# Altium PCB EG4S20_CoreBoard.PcbDoc
Units mil, origin at the board's own origin, x right, y up, seen from the top; angles counter-clockwise.
Board outline 3937.01 x 2677.17 mil, 2 copper layers (Top Layer, Bottom Layer); 24 components, 35 nets, 425 pads, 46 vias.
Unrouted connection lines stored in the file: 4.
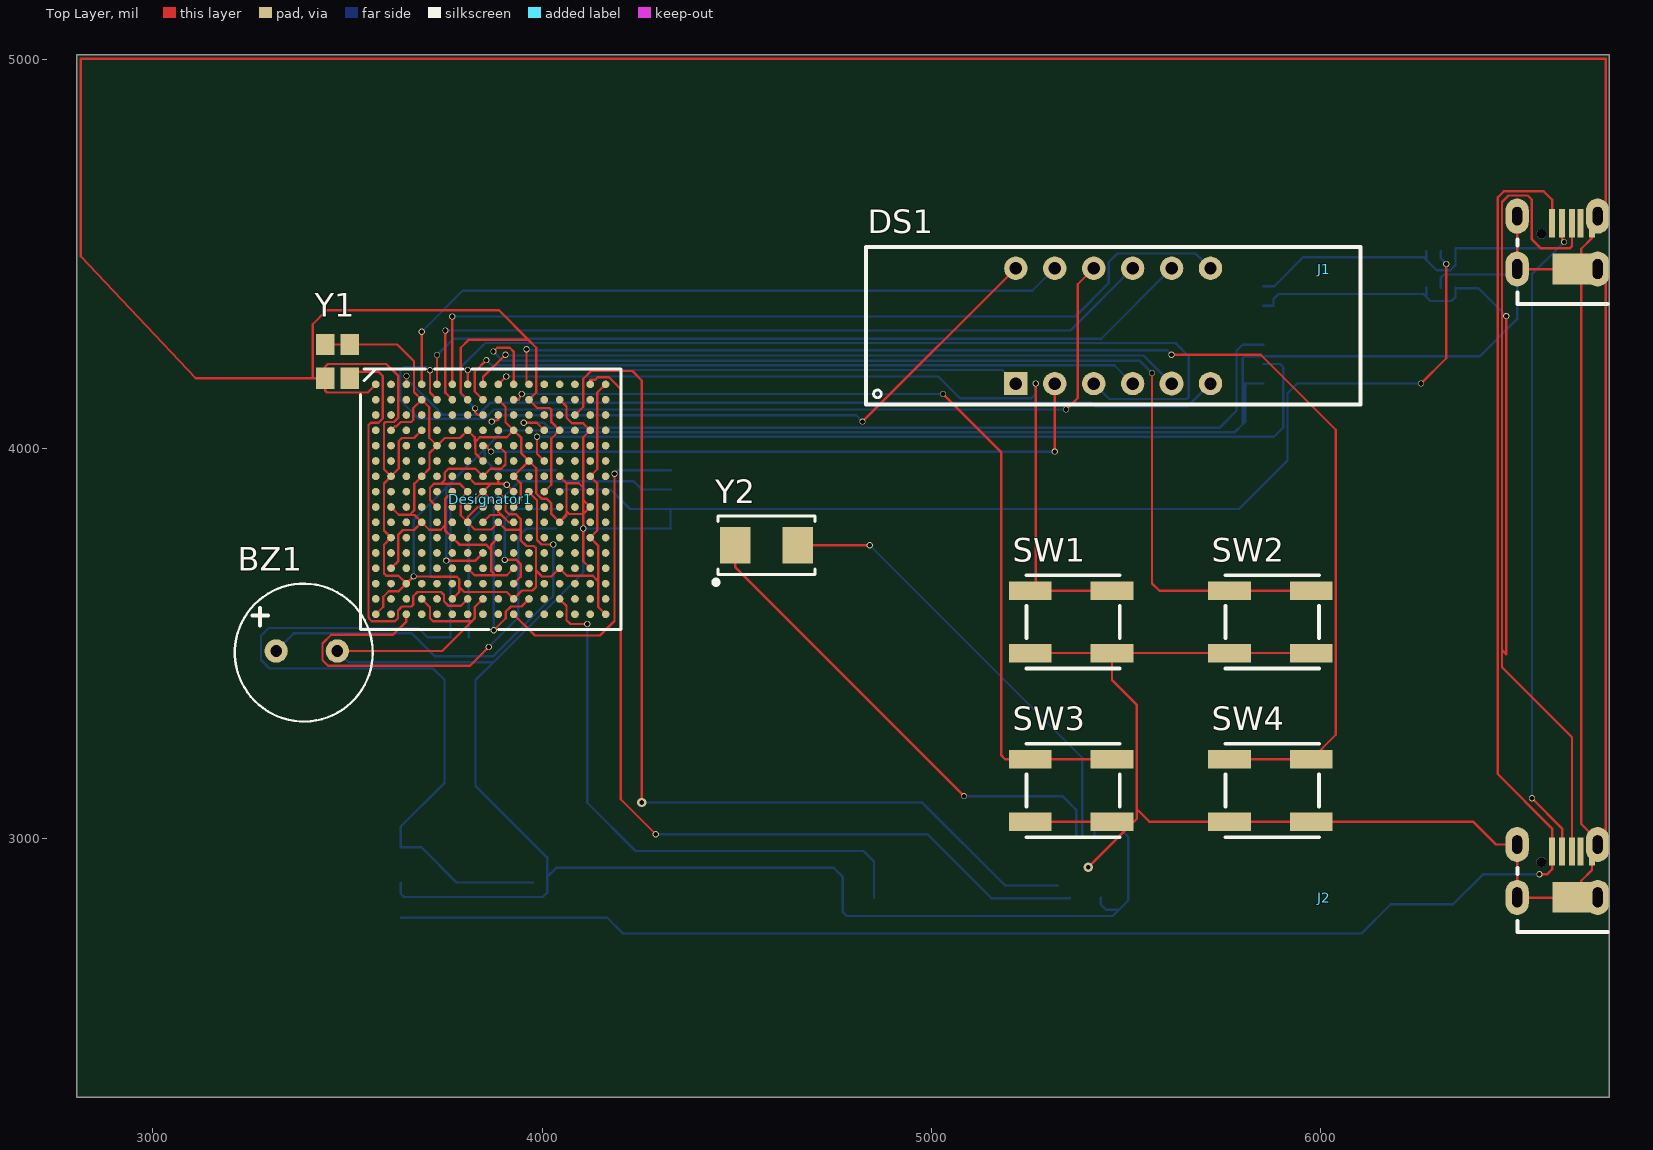
[diagram p0: Top Layer view]
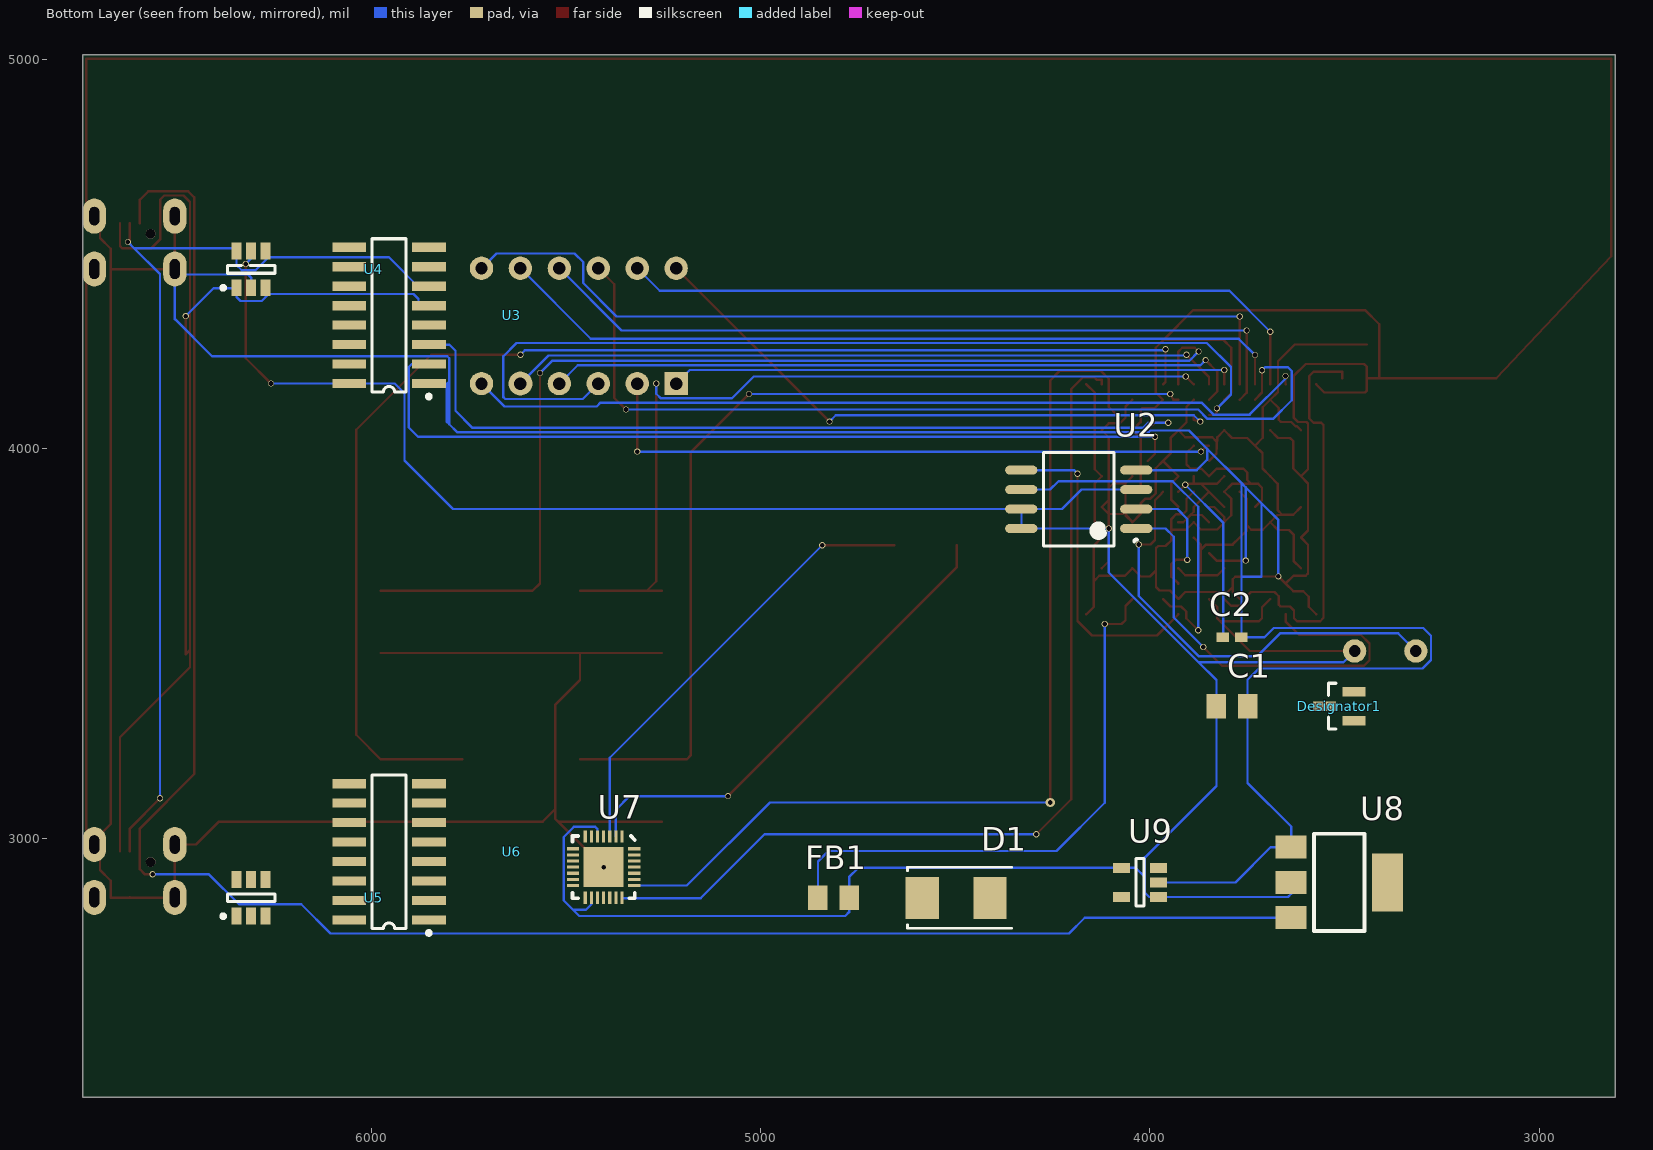
[diagram p1: Bottom Layer view, seen from below]

## Layer stack, top to bottom
Top Solder: solder mask 0.4, Solder Resist, Dk 3.5
Top Layer: signal copper 1.4
Dielectric 1: dielectric 12.6, FR-4, Dk 4.8
Bottom Layer: signal copper 1.4
Bottom Solder: solder mask 0.4, Solder Resist, Dk 3.5

## Board outline
2805,2335 6742.01,2335 6742.01,5012.16 2805,5012.16

## Design rules (kind name [scope] priority, off if disabled: settings)
Clearance [All] p1: gap=5 ignorepadtopadclearanceinfootprint=FALSE
MinimumSolderMaskSliver [All] p1: minsoldermaskwidth=3
PolygonConnect [All] p1: connectstyle=Relief reliefconductorwidth=10 reliefentries=4 polygonreliefangle="90 Angle" airgapwidth=10
RoutingVias [All] p1: holewidth=12 width=16 viastyle="Through Hole" minholewidth=12 minwidth=16 maxholewidth=12 maxwidth=16
SolderMaskExpansion [All] p1: expansion=0 istentingtop=FALSE
Width [All] p1: maxlimit=10 minlimit=5 preferedwidth=6
29 further rules are at their usual default settings.

## Components (designator, comment, footprint, x,y, rotation, side; value= is the part's Value field where it differs from the comment)
BZ1 "直插9040无源蜂鸣器" BUZZER_9*9_4MM 3395.55,3476.73 r0 top value={Value}
C1 "GRM21BC81C475KA88L" 0805_HV 3789.25,3338.94 r0 bottom value=4.7uF
C2 "C1005X7R1H104M" 0402 3789.25,3516.1 r0 bottom value=0.1uF
D1 "SS54" SMB 4497.91,2846.81 r0 bottom value=40V
Designator1 "Y" DBZ0003A_N 3513.66,3338.94 r0 bottom (schematic designator U10)
Designator1 "EG4S20BG256" FBGA256 3867.99,3870.43 r0 top (schematic designator U1)
DS1 "CS32841A" CS2845AUR 5482.16,4283.82 r0 top
FB1 "GZ2012V121TF" 0805_HV 4812.87,2846.81 r0 bottom value="120 ohm"
J1 "micro-usb-sj20" YQMICRO-USB-SJ20 6009.72,4460.98 r90 top
J2 "micro-usb-sj20" YQMICRO-USB-SJ20 6009.72,2846.81 r90 top
SW1 "贴片按键" "BUTTOM_T_6*6 *4.3" 5364.05,3555.47 r0 top
SW2 "贴片按键" "BUTTOM_T_6*6 *4.3" 5875.87,3555.47 r0 top
SW3 "贴片按键" "BUTTOM_T_6*6 *4.3" 5364.05,3122.4 r0 top
SW4 "贴片按键" "BUTTOM_T_6*6 *4.3" 5875.87,3122.4 r0 top
U2 "W25Q16" MICT-MW-8_N 4182.95,3870.43 r0 bottom
U3 "CH340G" SOP16M 5639.65,4342.87 r180 bottom
U4 "SRV05-4" DBV0006A_N 5993.98,4460.98 r180 bottom
U5 "SRV05-4" DBV0006A_N 5993.98,2846.81 r180 bottom
U6 "CH340G" SOP16M 5639.65,2964.92 r180 bottom
U7 "GD32F150G8U6" WQFN-28_L4.0-W4.0-P0.40-BL-EP 5403.42,2925.55 r0 bottom
U8 "LD1117-3.3" SOT223-L 3513.66,2886.18 r0 bottom
U9 "MT3520B" DBV0005A_N 4025.47,2886.18 r0 bottom
Y1 "7X-50.000MBB-T" XTAL_NX3225SA 3474.29,4224.76 r0 top
Y2 "ABLS-12.000MHZ-B4-T" YQ_OSC5032 4576.65,3752.32 r0 top

## Footprints (in the part's own frame and the unit in brackets; to place one, negate y for a bottom-side part, rotate by r counter-clockwise, add the part's x,y. Pads: shape width x height; smd on the part's side, far side on the other; paste and mask are expansions set on the pad)
0402 [mil] "0402 from SM-752 data"
0805_HV [mil] "0805 with 30mil clearance between pads"
"BUTTOM_T_6*6 *4.3" [mil]
BUZZER_9*9_4MM [mil]
CS2845AUR [mil] "4位数码管"
DBV0005A_N [mil] "SOT23, 5-Leads, Body 2.9x1.6mm, Pitch 0.95mm, Lead Span 2.8mm, IPC Medium Density"
DBV0006A_N [mil] "SOT23, 6-Leads, Body 2.9x1.6mm, Pitch 0.95mm, Lead Span 2.8mm, IPC Medium Density"
DBZ0003A_N [mil] "SOT23, 3-Leads, Body 2.9x1.3mm, Pitch 0.95mm, Lead Span 2.4mm, IPC Medium Density"
FBGA256 [mil] "256-Ball FineLine Ball Grid Array (FBGA256) - Option 1"
MICT-MW-8_N [mil] "SOIC, 8-Leads, Body 6.2x6.1mm, Pitch 1.27mm, IPC Medium Density"
SMB [mil] "Molded Diode, 2-Leads, Body 5.4x3.6mm, IPC Medium Density, based on OnSemi component dimensions"
SOP16M [mil]
SOT223-L [mil]
WQFN-28_L4.0-W4.0-P0.40-BL-EP [mil]
XTAL_NX3225SA [mil] "NDK NX3225SA recommended land pattern"
YQ_OSC5032 [mil]
YQMICRO-USB-SJ20 [mil] "MICRO-USB-SJ20"

## Part data
BZ1: library part BUZZER_EFBAA14D001, "Buzzer, 74 dB min, 25V p-p, 8500pF @ 1kHz，直插9040无源蜂鸣器", Manufacturer=Panasonic, Area=264,208, ComponentHeight="0.276 inch", ComponentLink1Description="AEO Datasheet Link", PackageReference="0.550 DIA.", PartNumber=直插9040无源蜂鸣器, SymbolVersion="07/31/2009 12:17:27"
C1: "CAP, CERM, 4.7 µF, 16 V, +/- 10%, X6S, 0805", Cap_Case=0805, Manufacturer=MuRata, Supplier Part Number 1=GRM21BC81C475KA88L-ND, TempCo=X6S, Tolerance_%=10, Value1=Unknown, Value2=16V, ValueDisplayed=4.7µF, Cap_F=0.0000047, ComponentLink1Description="Datasheet link", ComponentLink1URL=http://search.murata.co.jp/Ceramy/PnsearchViewAction.do?HnOFG=ON&HnNFG=ON&SEL_CNT=50&sLang=en&sKey=GRM21BC81C475KA88L&x=9&y=9&search=startwith, CompType=Capacitor, LatestRevisionDate=2015-05-02, MountType=SMT, PackageReference=0805, PartNumber=GRM21BC81C475KA88L, Polarized=N, Published=2008-06-19, Publisher="Texas Instruments", RoHS=Y, Supplier 1=Digi-Key, Supplier 2=Mouser, Supplier 3=Farnell, Supplier Part Number 2=81-GRM21BC81C475KA8L, Supplier Part Number 3=1889279, SymbolVersion=2008-07-09, TaMax_C=105, TaMin_C=-55, Technology=Ceramic, U/M=EA, VDC_V=16
C2: library part C1005X7R1H104M_1, "CAP, CERM, 0.1 μF, 50 V, +/- 20%, X7R, 0402", Cap_Case=0402, Manufacturer=TDK, Supplier Part Number 1=445-5933-1-ND, TempCo=X7R, Tolerance_%=20, Value1=Unknown, Value2=50V, ValueDisplayed=0.1μF, Cap_F=0.0000001, ComponentLink1Description="Datasheet link", CompType=Capacitor, LatestRevisionDate=2015-05-02, MountType=SMT, PackageReference=0402, PartNumber=C1005X7R1H104M, Polarized=N, Published=2008-06-19, Publisher="Texas Instruments", RoHS=Y, Supplier 1=Digi-Key, Supplier 2=Farnell, Supplier Part Number 2=1907278, SymbolVersion=2008-07-09, TaMax_C=125, TaMin_C=-55, Technology=Ceramic, U/M=EA, VDC_V=50
D1: library part B340B-13-F, "Diode, Schottky, 40 V, 3A, SMB", Manufacturer="Diodes Inc.", Supplier Part Number 1=B340B-FDICT-ND, Value1=3A, Value2=0.5V, ComponentLink1Description="Datasheet link", ComponentLink1URL=http://www.diodes.com/datasheets/ds30924.pdf, CompType=Diode, Io_A=3, LatestRevisionDate=2015-04-30, MountType=SMT, PackageReference=SMB, PartNumber=SS54, Published=2008-06-26, Publisher="Texas Instruments", RJC_CperW=25, RoHS=Y, Supplier 1=Digi-Key, Supplier 2=Mouser, Supplier 3=Farnell, Supplier Part Number 2=621-B340B-F, Supplier Part Number 3=1843677, SymbolVersion=2008-12-08, TJmax_C=125, Type=Schottky, U/M=EA, Vf_V=0.5, Vr_V=40
Designator1: library part TL431AIDBZ, "PRECISION PROGRAMMABLE REFERENCE, DBZ0003A", Alternate Manufacturer="Texas Instruments", ComponentLink1Description="Datasheet Link", ComponentLink1URL=http://www.ti.com/lit/ds/symlink/tl431.pdf, CompType=IC, IGNORE=Y, LatestRevisionDate=2015-05-05, Manufacturer="Texas Instruments", MountType=SMT, PackageReference=DBZ0003A, Parameter 1=NC, PartNumber=TL431AIDBZ, Publisher="Texas Instruments", RoHS=Y, SymbolCreator=a0412235, SymbolVersion=2013-02-15, U/M=EA
DS1: library part 4LED-ANODE, "4位共阴数码管，红色"
FB1: library part BLM21BD121SN1D, "Ferrite Bead, 120 ohm @ 100 MHz, 0.2 A, 0805", Manufacturer=MuRata, Supplier Part Number 1=490-1044-1-ND, Value1="0.25 ohm", Value2=0.2A, ComponentLink1Description="Datasheet link", ComponentLink1URL=http://search.murata.co.jp/Ceramy/image/img/PDF/ENG/L0110S0100BLM21B.pdf, CompType="Ferrite Bead", DCR_ohm=0.25, Imax_A=0.2, LatestRevisionDate=2015-05-01, MountType=SMT, PackageReference=0805, PartNumber=GZ2012V121TF, Published=2014-04-30, Publisher="Texas Instruments", RoHS=Y, Supplier 1=Digi-Key, Supplier 2=Mouser, Supplier 3=Farnell, Supplier Part Number 2=81-BLM21BD121SN1D, Supplier Part Number 3=1515637, SymbolVersion=2009-06-02, ZTyp@100MHz_Ohm=120
J1 J2: library part 105017-0001, "Receptacle, Micro-USB-B, Right Angle, SMD", Manufacturer=Molex, Supplier Part Number 1=WM1399CT-ND, ComponentLink1Description="Datasheet Link", ComponentLink1URL=http://www.molex.com/pdm_docs/sd/1050170001_sd.pdf, CompType=Connector, LatestRevisionDate=2012-12-26, LatestRevisionNote="Added parts, moved some to Hardware.IntLib", MountType=SMT, PackageReference="Micro USB receptacle", PartNumber=micro-usb-sj20, Publisher="Texas Instruments", RoHS=Y, Supplier 1=Digi-Key, Supplier 2=Mouser, Supplier 3=Farnell, Supplier Part Number 2=538-105017-0001, Supplier Part Number 3=1847433, SymbolCreator=a0412235, SymbolVersion=2012-12-19, U/M=EA
SW1 SW2 SW3 SW4: library part SW-PB, "米黄色圆形按键6*6*3.4"
U2: library part W25Q80BLSNIG, "2.5V 8M-Bit Serial Flash Memory with Dual and Quad SPI, SOIC-8", Manufacturer=Winbond, Supplier Part Number 1=W25Q80BLSNIG-ND, ComponentLink1Description="Datasheet Link", ComponentLink1URL=http://www.winbond.com/resource-files/da00-w25q80blf1.pdf, LatestRevisionDate=2015-05-05, MountType=SMT, PackageReference=SOIC-8, PartNumber=W25Q16, Publisher="Texas Instruments", RoHS=Y, Supplier 1=Digi-Key, SymbolCreator=Altium, SymbolVersion=2015-04-01
U3 U6: "USB2UART"
U4 U5: library part TPD4E001DBVR, "Low-Capacitance + / - 15-kV ESD Protection Array for High-Speed Data Interfaces, 4 Channels, -40 to +85 degC, 6-pin SOT-23 (DBV), Green (RoHS & no Sb/Br)", Alternate Manufacturer=None, Alternate PartNumber=Equivalent, Breakdown Voltage(Min)(V)=11, IO Capacitance(Typ)(pF)=1.5, Manufacturer="Texas Instruments", Supplier Part Number 1=296-28203-2-ND, 1394 / Firewire=TRUE, Code_JEDEC=MO-178-AB*, ComponentLink1Description=Datasheet, ComponentLink1URL=http://www.ti.com/general/docs/lit/getliterature.tsp?genericPartNumber=TPD4E001&fileType=pdf, ComponentLink2Description="URL Link1", ComponentLink2URL=SamplesURL:http://www.ti.com/product/tpd4e001#samples, DatasheetVersion=SLLS682G, Eco-Plan="Green (RoHS & no Sb/Br)", IEC 61000-4-2 Air-Gap(+/- kV)=15, IEC 61000-4-2 Contact(+/- kV)=8, IO Leakage Current(nA)=1.5, MountType=SMT, PackageDescription="6-Pin Plastic Small-Outline Package, 2.9 x 1.6 mm Body, 0.95 mm Pitch, 2.8 mm Lead Span", PackageReference=DBV0006A, PackageVersion="revK, Mar-2006", PartNumber=TPD4E001DBVR, Serial ATA / eSATA=TRUE, SubFamily="ESD Solution", Supplier 1=Digi-Key, Supplier 2=Digi-Key, Supplier 3=Digi-Key, Supplier 4=Newark, Supplier 5=Mouser, Supplier Part Number 2=296-28203-1-ND, Supplier Part Number 3=296-28203-6-ND, Supplier Part Number 4=27T6836, Supplier Part Number 5=595-TPD4E001DBVR, USB High Speed=TRUE
U7: library part GD32F150U, "GD32F150U", ComponentLink1Description="Manufacturer URL", ComponentLink1URL=http://www.ti.com/, ComponentLink2Description=Datasheet, ComponentLink2URL=http://www.ti.com/general/docs/lit/getliterature.tsp?genericPartNumber=DAC904&fileType=pdf, ComponentLink3Description="Package Specification", ComponentLink3URL=http://www.ti.com/litv/pdf/mpds364
U8: library part AMS1117, "LDO电源"
U9: library part RT8097, "1MHZ,2A,STEP-DOWM DC/DC", PartNumber=MT3520B
Y1: library part 7X-20.000MBB-T_1, "Crystal, 有源晶振，Sealed Locked 50MHz, 15pF, SMD", Frequency=50MHz, Frequency Stability=?ppm, Manufacturer="TXC Corporation", Supplier Part Number 1=887-1217-1-ND, ComponentLink1Description="Datasheet Link", ComponentLink1URL=http://www.txccrystal.com/images/pdf/7x.pdf, CompType=Oscillator, LatestRevisionDate=2013-06-18, LatestRevisionNote="Changed publisher", MountType=SMT, PackageReference="3.2x1x2.5 mm", PartNumber=7X-50.000MBB-T, Publisher="Texas Instruments", RoHS=Y, Supplier 1=Digi-Key, Supplier 2=Mouser, Supplier 3=Farnell, Supplier Part Number 2=717-7X-20.000MBB-T, Supplier Part Number 3=1842164, SymbolCreator=a0799628, SymbolVersion=2013-06-14, TaMax_C=85, TaMin_C=-40, U/M=EA
Y2: library part ABLS-8.000MHZ-B4-T, "Crystal, 12MHz, 18pF, SMD,无源", Frequency=12MHz, Frequency Stability=±50ppm, Manufacturer="Abracon Corportation", Supplier Part Number 1=535-10212-1-ND, ComponentLink1Description="Datasheet Link", ComponentLink1URL=http://www.abracon.com/Resonators/abls.pdf, CompType=Crystal, LatestRevisionDate=2015-05-05, MountType=SMT, PackageReference="Crystal, 11.4x4.3x3.8mm", PartNumber=ABLS-12.000MHZ-B4-T, Publisher="Texas Instruments", RoHS=Y, Supplier 1=Digi-Key, Supplier 2=Mouser, Supplier Part Number 2=815-ABLS-8.0M-T, SymbolCreator=a0412235, SymbolVersion=2008-07-09, TaMax_C=70, TaMin_C=0, U/M=EA

## Free pads (board coordinates)
  oval 60x90 on Top Paste: 0(6504.79,2847.81) 0(6504.79,2983.62) 0(6504.79,4461.98) 0(6504.79,4597.79) 0(6711.61,2847.81) 0(6711.61,2983.62) 0(6711.61,4461.98) 0(6711.61,4597.79)
  round 60 hole 30: 1(3316.81,3480.79) 2(3474.29,3480.79)
  rect 47.24x55.12 smd: 1(3442.79,4268.07) 2(3442.79,4181.46) 3(3505.79,4181.46) 4(3505.79,4268.07)
  rect 59.06x23.62 smd far side: 1(3476.26,3301.53) 2(3476.26,3376.34) 3(3551.06,3338.94)
  rect 78.74x59.06 smd far side: 1(3637.68,2976.73) 2(3637.68,2886.18) 3(3637.68,2795.63)
  rect 50x63 smd far side: 1(3749.25,3338.94) 1(4772.87,2846.81) 2(3829.25,3338.94) 2(4852.87,2846.81)
  rect 31.5x23.62 smd far side: 1(3765.63,3516.1) 2(3812.87,3516.1)
  rect 43.31x25.59 smd far side: 1(3978.23,2848.78) 2(3978.23,2886.18) 3(3978.23,2923.58) 4(4072.72,2923.58) 5(4072.72,2848.78)
  oval 82.68x23.62 smd far side: 1(4035.31,3795.43) 2(4035.31,3845.43) 3(4035.31,3895.43) 4(4035.31,3945.43) 5(4330.59,3945.43) 6(4330.59,3895.43) 7(4330.59,3845.43) 8(4330.59,3795.43)
  rect 85x107.99 smd far side: 1(4410.91,2846.81) 2(4584.92,2846.81)
  rect 78.74x94.49 smd: 1(4496.65,3752.32) 2(4656.65,3752.32)
  rect 60x60 hole 32: 1(5217.16,4167.76)
  rect 110.24x47.24 smd: 1(5254.05,3202.4) 1(5254.05,3635.47) 1(5464.05,3202.4) 1(5464.05,3635.47) 1(5765.87,3202.4) 1(5765.87,3635.47) 1(5975.87,3202.4) 1(5975.87,3635.47) 2(5254.05,3042.4) 2(5254.05,3475.47) 2(5464.05,3042.4) 2(5464.05,3475.47) 2(5765.87,3042.4) 2(5765.87,3475.47) 2(5975.87,3042.4) 2(5975.87,3475.47)
  rect 7.87x31.5 smd far side: 1(5356.18,3004.29) 2(5371.93,3004.29) 3(5387.68,3004.29) 4(5403.42,3004.29) 5(5419.17,3004.29) 6(5434.92,3004.29) 7(5450.67,3004.29) 15(5450.67,2846.81) 16(5434.92,2846.81) 17(5419.17,2846.81) 18(5403.42,2846.81) 19(5387.68,2846.81) 20(5371.93,2846.81) 21(5356.18,2846.81)
  rect 86.61x23.62 smd far side: 1(5852.24,2789.92) 1(5852.24,4167.87) 2(5852.24,2839.92) 2(5852.24,4217.87) 3(5852.24,2889.92) 3(5852.24,4267.87) 4(5852.24,2939.92) 4(5852.24,4317.87) 5(5852.24,2989.92) 5(5852.24,4367.87) 6(5852.24,3039.92) 6(5852.24,4417.87) 7(5852.24,3089.92) 7(5852.24,4467.87) 8(5852.24,3139.92) 8(5852.24,4517.87) 9(6056.97,3139.92) 9(6056.97,4517.87) 10(6056.97,3089.92) 10(6056.97,4467.87) 11(6056.97,3039.92) 11(6056.97,4417.87) 12(6056.97,2989.92) 12(6056.97,4367.87) 13(6056.97,2939.92) 13(6056.97,4317.87) 14(6056.97,2889.92) 14(6056.97,4267.87) 15(6056.97,2839.92) 15(6056.97,4217.87) 16(6056.97,2789.92) 16(6056.97,4167.87)
  rect 25.59x43.31 smd far side: 1(6346.34,2799.57) 1(6346.34,4413.74) 2(6308.94,2799.57) 2(6308.94,4413.74) 3(6271.54,2799.57) 3(6271.54,4413.74) 4(6271.54,2894.05) 4(6271.54,4508.23) 5(6308.94,2894.05) 5(6308.94,4508.23) 6(6346.34,2894.05) 6(6346.34,4508.23)
  rect 15.75x72.83 smd: 1(6594.75,2965.53) 1(6594.75,4579.7) 2(6620.34,2965.53) 2(6620.34,4579.7) 3(6645.93,2965.53) 3(6645.93,4579.7) 4(6667.52,2965.53) 4(6667.52,4579.7) 5(6697.11,2965.53) 5(6697.11,4579.7)
  round 60 hole 32: 2(5317.16,4167.76) 3(5417.16,4167.76) 4(5517.16,4167.76) 6(5717.16,4167.76) 7(5717.16,4463.82) 8(5617.16,4463.82) 9(5517.16,4463.82) 10(5417.16,4463.82) 11(5317.16,4463.82) 12(5217.16,4463.82)
  rect 78.74x149.61 smd far side: 4(3389.65,2886.18)
  round 62 hole 32: 5(5617.16,4167.76)
  oval 60x90 hole 25.59 slot 51.18 at 90 deg: 6(6504.79,2847.81) 6(6504.79,4461.98) 9(6711.61,2847.81) 9(6711.61,4461.98)
  rect 49.21x78.74 smd: 7(6620.93,2847.81) 7(6620.93,4461.98) 8(6669.79,2847.81) 8(6669.79,4461.98)
  rect 31.5x7.87 smd far side: 8(5482.16,2972.79) 9(5482.16,2957.05) 10(5482.16,2941.3) 11(5482.16,2925.55) 12(5482.16,2909.8) 13(5482.16,2894.05) 14(5482.16,2878.31) 22(5324.68,2878.31) 23(5324.68,2894.05) 24(5324.68,2909.8) 25(5324.68,2925.55) 26(5324.68,2941.3) 27(5324.68,2957.04) 28(5324.68,2972.79)
  oval 60x90 hole 25.59 slot 47.24 at 90 deg: 10(6711.61,2983.62) 10(6711.61,4597.79) 11(6504.79,2983.62) 11(6504.79,4597.79)
  round 25 hole 25: 12(6567.2,2938.35) 12(6567.2,4552.52)
  rect 102.36x102.36 smd far side: 29(5403.42,2925.55)
  round 19.68 smd: A1(3572.72,4165.71) A2(3612.09,4165.71) A3(3651.46,4165.71) A4(3690.83,4165.71) A5(3730.2,4165.71) A6(3769.57,4165.71) A7(3808.94,4165.71) A8(3848.31,4165.71) A9(3887.68,4165.71) A10(3927.05,4165.71) A11(3966.42,4165.71) A12(4005.79,4165.71) A13(4045.16,4165.71) A14(4084.53,4165.71) A15(4123.9,4165.71) A16(4163.27,4165.71) B1(3572.72,4126.34) B2(3612.09,4126.34) B3(3651.46,4126.34) B4(3690.83,4126.34) B5(3730.2,4126.34) B6(3769.57,4126.34) B7(3808.94,4126.34) B8(3848.31,4126.34) B9(3887.68,4126.34) B10(3927.05,4126.34) B11(3966.42,4126.34) B12(4005.79,4126.34) B13(4045.16,4126.34) B14(4084.53,4126.34) B15(4123.9,4126.34) B16(4163.27,4126.34) C1(3572.72,4086.97) C2(3612.09,4086.97) C3(3651.46,4086.97) C4(3690.83,4086.97) C5(3730.2,4086.97) C6(3769.57,4086.97) C7(3808.94,4086.97) C8(3848.31,4086.97) C9(3887.68,4086.97) C10(3927.05,4086.97) C11(3966.42,4086.97) C12(4005.79,4086.97) C13(4045.16,4086.97) C14(4084.53,4086.97) C15(4123.9,4086.97) C16(4163.27,4086.97) D1(3572.72,4047.6) D2(3612.09,4047.6) D3(3651.46,4047.6) D4(3690.83,4047.6) D5(3730.2,4047.6) D6(3769.57,4047.6) D7(3808.94,4047.6) D8(3848.31,4047.6) D9(3887.68,4047.6) D10(3927.05,4047.6) D11(3966.42,4047.6) D12(4005.79,4047.6) D13(4045.16,4047.6) D14(4084.53,4047.6) D15(4123.9,4047.6) D16(4163.27,4047.6) E1(3572.72,4008.23) E2(3612.09,4008.23) E3(3651.46,4008.23) E4(3690.83,4008.23) E5(3730.2,4008.23) E6(3769.57,4008.23) E7(3808.94,4008.23) E8(3848.31,4008.23) E9(3887.68,4008.23) E10(3927.05,4008.23) E11(3966.42,4008.23) E12(4005.79,4008.23) E13(4045.16,4008.23) E14(4084.53,4008.23) E15(4123.9,4008.23) E16(4163.27,4008.23) F1(3572.72,3968.86) F2(3612.09,3968.86) F3(3651.46,3968.86) F4(3690.83,3968.86) F5(3730.2,3968.86) F6(3769.57,3968.86) F7(3808.94,3968.86) F8(3848.31,3968.86) F9(3887.68,3968.86) F10(3927.05,3968.86) F11(3966.42,3968.86) F12(4005.79,3968.86) F13(4045.16,3968.86) F14(4084.53,3968.86) F15(4123.9,3968.86) F16(4163.27,3968.86) G1(3572.72,3929.49) G2(3612.09,3929.49) G3(3651.46,3929.49) G4(3690.83,3929.49) G5(3730.2,3929.49) G6(3769.57,3929.49) G7(3808.94,3929.49) G8(3848.31,3929.49) G9(3887.68,3929.49) G10(3927.05,3929.49) G11(3966.42,3929.49) G12(4005.79,3929.49) G13(4045.16,3929.49) G14(4084.53,3929.49) G15(4123.9,3929.49) G16(4163.27,3929.49) H1(3572.72,3890.12) H2(3612.09,3890.12) H3(3651.46,3890.12) H4(3690.83,3890.12) H5(3730.2,3890.12) H6(3769.57,3890.12) H7(3808.94,3890.12) H8(3848.31,3890.12) H9(3887.68,3890.12) H10(3927.05,3890.12) H11(3966.42,3890.12) H12(4005.79,3890.12) H13(4045.16,3890.12) H14(4084.53,3890.12) H15(4123.9,3890.12) H16(4163.27,3890.12) J1(3572.72,3850.75) J2(3612.09,3850.75) J3(3651.46,3850.75) J4(3690.83,3850.75) J5(3730.2,3850.75) J6(3769.57,3850.75) J7(3808.94,3850.75) J8(3848.31,3850.75) J9(3887.68,3850.75) J10(3927.05,3850.75) J11(3966.42,3850.75) J12(4005.79,3850.75) J13(4045.16,3850.75) J14(4084.53,3850.75) J15(4123.9,3850.75) J16(4163.27,3850.75) K1(3572.72,3811.38) K2(3612.09,3811.38) K3(3651.46,3811.38) K4(3690.83,3811.38) K5(3730.2,3811.38) K6(3769.57,3811.38) K7(3808.94,3811.38) K8(3848.31,3811.38) K9(3887.68,3811.38) K10(3927.05,3811.38) K11(3966.42,3811.38) K12(4005.79,3811.38) K13(4045.16,3811.38) K14(4084.53,3811.38) K15(4123.9,3811.38) K16(4163.27,3811.38) L1(3572.72,3772.01) L2(3612.09,3772.01) L3(3651.46,3772.01) L4(3690.83,3772.01) L5(3730.2,3772.01) L6(3769.57,3772.01) L7(3808.94,3772.01) L8(3848.31,3772.01) L9(3887.68,3772.01) L10(3927.05,3772.01) L11(3966.42,3772.01) L12(4005.79,3772.01) L13(4045.16,3772.01) L14(4084.53,3772.01) L15(4123.9,3772.01) L16(4163.27,3772.01) M1(3572.72,3732.64) M2(3612.09,3732.64) M3(3651.46,3732.64) M4(3690.83,3732.64) M5(3730.2,3732.64) M6(3769.57,3732.64) M7(3808.94,3732.64) M8(3848.31,3732.64) M9(3887.68,3732.64) M10(3927.05,3732.64) M11(3966.42,3732.64) M12(4005.79,3732.64) M13(4045.16,3732.64) M14(4084.53,3732.64) M15(4123.9,3732.64) M16(4163.27,3732.64) N1(3572.72,3693.27) N2(3612.09,3693.27) N3(3651.46,3693.27) N4(3690.83,3693.27) N5(3730.2,3693.27) N6(3769.57,3693.27) N7(3808.94,3693.27) N8(3848.31,3693.27) N9(3887.68,3693.27) N10(3927.05,3693.27) N11(3966.42,3693.27) N12(4005.79,3693.27) N13(4045.16,3693.27) N14(4084.53,3693.27) N15(4123.9,3693.27) N16(4163.27,3693.27) P1(3572.72,3653.9) P2(3612.09,3653.9) P3(3651.46,3653.9) P4(3690.83,3653.9) P5(3730.2,3653.9) P6(3769.57,3653.9) P7(3808.94,3653.9) P8(3848.31,3653.9) P9(3887.68,3653.9) P10(3927.05,3653.9) P11(3966.42,3653.9) P12(4005.79,3653.9) P13(4045.16,3653.9) P14(4084.53,3653.9) P15(4123.9,3653.9) P16(4163.27,3653.9) R1(3572.72,3614.53) R2(3612.09,3614.53) R3(3651.46,3614.53) R4(3690.83,3614.53) R5(3730.2,3614.53) R6(3769.57,3614.53) R7(3808.94,3614.53) R8(3848.31,3614.53) R9(3887.68,3614.53) R10(3927.05,3614.53) R11(3966.42,3614.53) R12(4005.79,3614.53) R13(4045.16,3614.53) R14(4084.53,3614.53) R15(4123.9,3614.53) R16(4163.27,3614.53) T1(3572.72,3575.16) T2(3612.09,3575.16) T3(3651.46,3575.16) T4(3690.83,3575.16) T5(3730.2,3575.16) T6(3769.57,3575.16) T7(3808.94,3575.16) T8(3848.31,3575.16) T9(3887.68,3575.16) T10(3927.05,3575.16) T11(3966.42,3575.16) T12(4005.79,3575.16) T13(4045.16,3575.16) T14(4084.53,3575.16) T15(4123.9,3575.16) T16(4163.27,3575.16)

## Via types
v1: diameter 16, hole 12, Top Layer to Bottom Layer, 44 vias
v2: diameter 24, hole 12, Top Layer to Bottom Layer, 2 vias

## Nets (pads, with @x,y where several pads share a name; then routed paths per layer and width w, separated by ;. In a path a pad name is that pad's centre, name@x,y a point inside that pad or via, vN(x,y) a via of type N, cw(c..) or ccw(c..) an arc to the next point about the centre after c; other vN are vias at no path point)
BUZZER_H11: pad.1@3316.81,3480.79 pad.H11 | length 1131.2
  Top Layer w6: pad.H11 3974,3881.11 3987,3868.11 3987,3765.56 3998.39,3754.16 v1(4029,3754.16)
  Bottom Layer w6: pad.1@3316.81,3480.79 3362.02,3526 3666,3526 3725,3467 3874,3467 4029,3622 v1(4029,3754.16)
CLK_20M: pad.3@3505.79,4181.46 pad.R7 | length 1100.1
  Top Layer w6: pad.3@3505.79,4181.46 3505.79,4198 3580,4198 3591,4187 3591,4078 3580,4067 3560,4067 3554,4061 3554,3566 3562.69,3557.31 3622.24,3557.31 3629.93,3565 3629.93,3584.93 3640,3595 3664.3,3595 3669.3,3600 3669.3,3621.67 3680,3632.37 3740.67,3632.37 3748.04,3625 3748.04,3608.64 3760,3596.68 3791.09,3596.68 pad.R7
DIG1: pad.12@5217.16,4463.82 pad.C9 | length 1552.3
  Top Layer w6: v1(3871,4070) 3887.68,4075 pad.C9 ; v1(4823.35,4070) pad.12@5217.16,4463.82
  Bottom Layer w6: v1(3871,4070) 3887.44,4086.44 4806.9,4086.44 v1(4823.35,4070)
DIG2: pad.9@5517.16,4463.82 pad.B6 | length 2016.7
  Top Layer w6: v1(3751.72,4304) 3751.72,4144.18 pad.B6
  Bottom Layer w6: v1(3751.72,4304) 5357.35,4304 pad.9@5517.16,4463.82
DIG3: pad.8@5617.16,4463.82 pad.A5 | length 2054.6
  Top Layer w6: pad.A5 v1(3730.2,4241)
  Bottom Layer w6: v1(3730.2,4241) 3772.2,4283 5436.35,4283 pad.8@5617.16,4463.82
DIG4: pad.6@5717.16,4167.76 pad.A3 | length 2173.2
  Top Layer w6: pad.A3 3652,4165.71 v1(3652,4187)
  Bottom Layer w6: v1(3652,4187) 3652,4180 3744,4088 3837,4088 3867.76,4118.76 5411.24,4118.76 5421,4109 5658.41,4109 pad.6@5717.16,4167.76
GND: pad.1@3637.68,2976.73 pad.1@3749.25,3338.94 pad.1@3765.63,3516.1 pad.1@5852.24,4167.87 pad.2@3442.79,4181.46 pad.2@3978.23,2886.18 pad.2@5254.05,3042.4 pad.2@5254.05,3475.47 pad.2@5464.05,3042.4 pad.2@5464.05,3475.47 pad.2@5765.87,3042.4 pad.2@5765.87,3475.47 pad.2@5975.87,3042.4 pad.2@5975.87,3475.47 pad.2@6308.94,4413.74 pad.4@4035.31,3945.43 pad.5@6697.11,2965.53 pad.5@6697.11,4579.7 pad.6@6504.79,2847.81 pad.6@6504.79,4461.98 pad.7@6620.93,2847.81 pad.7@6620.93,4461.98 pad.8@6669.79,2847.81 pad.8@6669.79,4461.98 pad.9@6711.61,2847.81 pad.9@6711.61,4461.98 pad.10@6711.61,2983.62 pad.10@6711.61,4597.79 pad.11@6504.79,2983.62 pad.11@6504.79,4597.79 pad.29 pad.A1 pad.A16 pad.B7 pad.B11 pad.D4 pad.D13 pad.E9 pad.G2 pad.G8 pad.G15 pad.H7 pad.H9 pad.H12 pad.J5 pad.J8 pad.K7 pad.K9 pad.L2 pad.L15 pad.M8 pad.N13 pad.P3 pad.R6 pad.R10 pad.T1 pad.T16 | length 24165.3
  Top Layer w6: pad.T1 3592,3594.44 3592,3620 3606,3634 3631.56,3634 pad.P3 ; pad.A1 3552.01,4145 3447.79,4145 3442.79,4150 pad.2@3442.79,4181.46 ; pad.D4 3671.23,4028 3640,4028 3632,4020 3632,3949.4 pad.G2 ; pad.J5 3712,3868.94 3712,3900 3722,3910 3740,3910 ; v1(3754.12,3713) 3828.67,3713 pad.M8 ; pad.R6 3787.41,3632.37 3787.41,3644.96 ; pad.B7 3791,4144.27 3791,4260 3811,4280 3965,4280 ; pad.J8 3834.68,3850.75 3808.94,3825 pad.K7 ; pad.H9 3906,3871.79 3906,3841 3915,3832 3933,3832 3945,3820 3945,3792 ; pad.E9 3906,3989.9 3906,3960 3895,3949 3867.82,3949 pad.G8 3828.79,3949 3760,3949 3750,3939 3750,3920 3740,3910 ; pad.H12 4023.63,3907.96 4023.63,4026.07 pad.D13 4024,4068.75 4024,4100 4019,4105 3987.75,4105 pad.B11 3985,4144.92 3985,4260 3965,4280 ; pad.T16 4144,3594.43 4144,3660.43 ; pad.A16 4142,4144.44 4142,3947.59 pad.G15 4142,3911.39 4142,3790.11 pad.L15 4144,3751.91 4144,3660.43 ; pad.2@5254.05,3042.4 5464.05,3042.4 5520.4,3042.4 ; pad.2@5254.05,3475.47 pad.2@5464,3475.47 ; v2(5403.42,2925.55) 5492.2,3014.23 5520.4,3042.4 ; pad.2@5975.87,3475.47 5765.87,3475.47 5464.05,3475.47 pad.2@5464,3475.47 ; pad.11@6504.79,4597.79 6504.79,4461.98 6504.79,4461 pad.7@6620.93,4461 ; pad.7@6620.93,2847.81 pad.7@6620.93,2847 ; pad.7@6620.93,4461.98 pad.7@6620.93,4461 ; pad.10@6697.11,4579.7 6697.11,4541.32 6669.79,4514 6669.79,4461.98 pad.8@6669.79,4461 ; pad.10@6732.16,2983.62 pad.9@6732.16,4461.98 ; pad.10@6732.16,4597.79 6732.16,5002.32 2820,5002.32 2814.84,5002.32 2814.84,4495 3110.54,4181.46 3411,4181.46 ; 3411,4181.46 pad.2@3442.79,4181.46 ; 3411,4181.46 3411,4320 3447.39,4356.39 3888.61,4356.39 3965,4280 ; pad.2@3442.79,4181.46 3442.79,4210.79 3450,4218 3600,4218 3631,4187 3631,4080.65 3619.48,4069.12 3598.12,4069.12 3594,4065 3594,3947.57 pad.G2 ; pad.G2 3594,3911.4 3594,3790.09 pad.L2 3594,3753.92 3594,3680 3600,3674 3631.35,3674 pad.P3 ; pad.P3 v1(3670,3672.44) 3713.56,3671.74 3780.67,3671.74 3787.41,3665 3787.41,3644.96 ; 3740,3910 3789.05,3910 pad.H7 3791,3872.18 3791,3829.31 pad.K7 ; 3787.41,3644.96 3800,3632.37 3909.2,3632.37 pad.R10 3948.57,3636.05 3975.31,3636.05 3984.26,3645 3984.26,3687.74 ; pad.K7 3827.31,3793 3869.3,3793 pad.K9 3907.05,3792 3945,3792 ; 3945,3792 3945,3765.48 3960,3750.48 3978.78,3750.48 3984.26,3745 3984.26,3687.74 ; 3984.26,3687.74 4000,3672 4023.89,3672 pad.N13 4064.42,3674 4130.43,3674 4144,3660.43 ; pad.2@5464,3475.47 5464,3406 5528,3342 5528,3074.4 ; 5520.4,3042.4 5528,3050 5528,3074.4 ; 5528,3074.4 5560,3042.4 5765.87,3042.4 5975.87,3042.4 6391.6,3042.4 6450.38,2983.62 6504.79,2983.62 6504.79,2847.81 6504.79,2847 pad.7@6620.93,2847 ; pad.7@6620.93,2847 6669.79,2847 6669.79,2847.81 6669.79,2890.68 6697.11,2918 6697.11,2965.53 6697.11,3008.89 6669.79,3036.21 pad.8@6669.79,4461 ; pad.7@6620.93,4461 pad.8@6669.79,4461
  Bottom Layer w6: v1(3670,3672.44) 3670,3817 3713.56,3860.56 ; v1(3754.12,3713) 3754.12,3901.12 ; pad.1@3765.63,3516.1 pad.1@3765,3516.1 ; pad.2@3978.23,2886.18 3780.55,2886.18 3690,2976.73 3637.68,2976.73 3637,2976.73 3637,3029.75 3749.25,3142 3749.25,3338.94 3749.25,3406.75 3720,3436 3300,3436 3278,3458 3278,3520 3298,3540 3682,3540 3705.9,3516.1 pad.1@3765,3516.1 ; pad.4@4035.31,3945.43 3880,3945.43 3853,3972.43 3853,4000 ; pad.1@5852.24,4167.87 5806,4167.87 ; pad.2@6308.94,4413.74 6308.94,4440 6316.94,4448 pad.6@6480,4448 ; pad.6@6504.79,4461.98 pad.6@6504.79,4448 ; 3713.56,3860.56 3754.12,3901.12 ; 3713.56,3860.56 3713.56,3671.74 3765,3671.74 ; 3754.12,3901.12 3765,3912 ; pad.1@3765,3516.1 3765,3671.74 ; 3765,3671.74 3765,3912 ; 3765,3912 3853,4000 ; 3853,4000 3900,4047 3999,4047 4003,4043 5780,4043 5800,4063 ; 5800,4063 5806,4069 5806,4167.87 ; 5800,4063 5800,4172.87 ; 5800,4172.87 5800,4233 5805,4238 6409.46,4238 6504.79,4333.32 pad.6@6504.79,4423.21 ; 5800,4172.87 5805,4167.87 5806,4167.87 ; pad.6@6480,4448 pad.6@6504.79,4448 ; pad.6@6480,4448 pad.6@6504.79,4423.21 ; pad.6@6504.79,4423.21 pad.6@6504.79,4448
JTAG_TCK: pad.22 pad.C14 | length 2511.3
  Top Layer w6: pad.C14 4106,4108.44 4106,4180 4126,4200 4232,4200 4256.21,4175.79 v2(4256.21,3091.79)
  Bottom Layer w6: v2(4256.21,3091.79) 4976.21,3091.79 5189.69,2878.31 pad.22
JTAG_TMS: pad.21 pad.A15 | length 2419.5
  Top Layer w6: pad.A15 4123.9,4178 4137,4178 4143,4184 4172,4184 4202,4154 4202,3100 v1(4292,3010)
  Bottom Layer w6: v1(4292,3010) 4990,3010 5154,2846 5356.18,2846 pad.21
OSC_IN: pad.1@4496.65,3752.32 pad.2@5371.93,3004.29 | length 1258.8
  Top Layer w6: pad.1@4496.65,3752.32 4496.65,3695.35 v1(5084,3108)
  Bottom Layer w6: v1(5084,3108) 5336.93,3108 5371.93,3073 pad.2@5371.93,3004.29
OSC_OUT: pad.2@4656.65,3752.32 pad.3@5387.68,3004.29 | length 1159.2
  Top Layer w6: pad.2@4656.65,3752.32 v1(4841.68,3752.32)
  Bottom Layer w6: v1(4841.68,3752.32) 5387.68,3206.32 pad.3@5387.68,3004.29
SEG_A: pad.11@5317.16,4463.82 pad.A4 | length 1829
  Top Layer w6: pad.A4 v1(3690.83,4300.89)
  Bottom Layer w6: v1(3690.83,4300.89) 3795.93,4406 5259.35,4406 pad.11@5317.16,4463.82
SEG_B: pad.7@5717.16,4463.82 pad.A6 | length 2236.4
  Top Layer w6: pad.A6 v1(3769.57,4340)
  Bottom Layer w6: v1(3769.57,4340) 5370,4340 5456,4426 5456,4480 5478,4502 5678.98,4502 pad.7@5717.16,4463.82
SEG_C: pad.4@5517.16,4167.76 pad.B8 | length 1808
  Top Layer w6: pad.B8 3827,4147.64 3827,4198 v1(3857,4228)
  Bottom Layer w6: v1(3857,4228) 3870,4215 5469.92,4215 pad.4@5517.16,4167.76
SEG_D: pad.2@5317.16,4167.76 pad.E8 | length 1653
  Top Layer w6: pad.E8 3859,4008.23 3859,4003 v1(3869,3993) ; v1(5317.16,3993) pad.2@5317.16,4167.76
  Bottom Layer w6: v1(3869,3993) v1(5317.16,3993)
SEG_DP: pad.3@5417.16,4167.76 pad.C8 | length 2430.3
  Top Layer w6: v1(3828,4104) 3828,4093.97 3835,4086.97 pad.C8
  Bottom Layer w6: v1(3828,4104) 3792,4140 3792,4210 3854,4272 5627,4272 5661,4238 5661,4133 5656,4128 5456.92,4128 pad.3@5417.16,4167.76
SEG_E: pad.1@5217.16,4167.76 pad.A7 | length 1459.5
  Top Layer w6: pad.A7 v1(3808.94,4202.55)
  Bottom Layer w6: v1(3808.94,4202.55) 5182.37,4202.55 pad.1@5217.16,4167.76
SEG_F: pad.10@5417.16,4463.82 pad.B5 | length 2373.8
  Top Layer w6: v1(3712,4202) 3712,4144.53 pad.B5 ; v1(5346,4101) 5376,4131 5376,4422.65 pad.10@5417.16,4463.82
  Bottom Layer w6: v1(3712,4202) 3704,4210 3646,4210 3636,4200 3636,4125 3684,4077 3852,4077 3876,4101 v1(5346,4101)
SEG_G: pad.5@5617.16,4167.76 pad.A8 | length 1842.1
  Top Layer w6: pad.A8 3848.31,4184.34 v1(3905.97,4242)
  Bottom Layer w6: v1(3905.97,4242) 3908.2,4239.77 5545.15,4239.77 pad.5@5617.16,4167.76
SPI_CLK: pad.6@4330.59,3895.43 pad.R11 | length 941.8
  Top Layer w6: v1(3876,3534) 3907,3565 3907,3582 3920,3595 3946.89,3595 pad.R11
  Bottom Layer w6: v1(3876,3534) 3876,3851.27 3941.73,3917 4235,3917 4256.57,3895.43 pad.6@4330.59,3895.43
SPI_CS: pad.1@4035.31,3795.43 pad.T3 | length 1173.2
  Top Layer w6: pad.T3 3651.46,3556.84 3616.93,3522.31 3458.31,3522.31 3436,3500 3436,3456.79 3450,3442.79 3814.79,3442.79 v1(3863,3491)
  Bottom Layer w6: v1(3863,3491) 3939,3567 3939,3774.43 3960,3795.43 pad.1@4035.31,3795.43
SPI_MISO: pad.2@4035.31,3845.43 pad.P10 | length 349.9
  Top Layer w6: v1(3904,3714.79) 3934,3714.79 3944.89,3703.9 3944.89,3671.74 pad.P10
  Bottom Layer w6: v1(3904,3714.79) 3904,3820 3929.43,3845.43 pad.2@4035.31,3845.43
SPI_MOSI: pad.5@4330.59,3945.43 pad.T10 | length 823.8
  Top Layer w6: pad.T10 3981.74,3520.46 4148.67,3520.46 4186,3557.8 v1(4186,3936)
  Bottom Layer w6: v1(4186,3936) 4195.43,3945.43 pad.5@4330.59,3945.43
SW1_A9: pad.1@5254.05,3635.47 pad.1@5464.05,3635.47 pad.A9 | length 2195.9
  Top Layer w6: pad.A9 v1(3907.97,4186) ; pad.1@5254.05,3635.47 pad.1@5292.53,3635.47 ; v1(5268,4168) 5268,3660 pad.1@5292.53,3635.47 ; pad.1@5464.05,3635.47 pad.1@5292.53,3635.47
  Bottom Layer w6: v1(3907.97,4186) 5018,4186 5074.24,4129.76 5256,4129.76 5268,4141.76 v1(5268,4168)
SW2_A10: pad.1@5765.87,3635.47 pad.1@5975.87,3635.47 pad.A10 | length 2816.7
  Top Layer w6: v1(3875,4250) 3885,4260 3917.05,4260 3927.05,4250 pad.A10 ; v1(5567,4195) 5567,3654.47 5586,3635.47 5765.87,3635.47 pad.1@5975.87,3635.47
  Bottom Layer w6: v1(3875,4250) 3899,4226 5536,4226 v1(5567,4195)
SW3_B10: pad.1@5254.05,3202.4 pad.1@5464.05,3202.4 pad.B10 | length 2390.6
  Top Layer w6: pad.B10 3940,4126.34 v1(3948,4141) ; v1(5030,4141) 5180,3991 5180,3212.4 5190,3202.4 5254.05,3202.4 pad.1@5464.05,3202.4
  Bottom Layer w6: v1(3948,4141) v1(5030,4141)
SW4_A11: pad.1@5765.87,3202.4 pad.1@5975.87,3202.4 pad.A11 | length 3340.4
  Top Layer w6: v1(3960,4256) 3960,4172.12 pad.A11 ; v1(5617,4242) 5846,4242 6039,4049 6039,3265.54 5975.87,3202.4 pad.1@5765.87,3202.4
  Bottom Layer w6: v1(3960,4256) 3963,4253 5606,4253 v1(5617,4242)
UART_RXD_F12: pad.2@5852.24,4217.87 pad.F12 | length 2206.9
  Top Layer w6: v1(3987,4031) 3987,3987.64 pad.F12
  Bottom Layer w6: v1(3987,4031) 5880,4031 5904,4055 5904,4210 5896.13,4217.87 pad.2@5852.24,4217.87
UART_TXD_D12: pad.3@5852.24,4267.87 pad.D12 | length 2144.2
  Top Layer w6: v1(3953,4067) 3986.38,4067 pad.D12
  Bottom Layer w6: v1(3953,4067) 4005,4067 4018,4054 5740,4054 5784,4098 5784,4251.87 5800,4267.87 pad.3@5852.24,4267.87
USB_D+: pad.1@6346.34,4413.74 pad.3@6271.54,4413.74 pad.3@6645.93,2965.53 pad.3@6645.93,4579.7 pad.5@5852.24,4367.87 | length 3727.6
  Top Layer w6: v1(6477,4341) 6477,3472 6466,3483 ; pad.3@6645.93,2965.53 6645.93,3259.07 6466,3439 6466,3483 ; pad.3@6645.93,4579.7 6645.93,4520.97 6640,4515.04 6565.96,4515.04 6542.79,4538.21 6542.79,4640 6531.99,4650.79 6482.79,4650.79 6466,4634 6466,4341 6466,3483
  Bottom Layer w6: pad.5@5852.24,4367.87 5879,4367.87 5879,4385 5892,4398 6263.54,4398 6271.54,4390 ; pad.3@6271.54,4413.74 6271.54,4390 ; pad.1@6346.34,4413.74 pad.1@6346.34,4413 ; v1(6477,4341) 6405,4413 pad.1@6346.34,4413 ; 6271.54,4390 6281.54,4380 6336.34,4380 6346.34,4390 pad.1@6346.34,4413
USB_D-: pad.2@6620.34,2965.53 pad.2@6620.34,4579.7 pad.4@6271.54,4508.23 pad.6@5852.24,4417.87 pad.6@6346.34,4508.23 | length 2555.2
  Top Layer w6: v1(6543,3102.34) 6620.34,3025 pad.2@6620.34,2965.53 ; pad.2@6620.34,4579.7 6620.34,4536.66 v1(6625.5,4531.5)
  Bottom Layer w6: pad.6@5852.24,4417.87 5880.87,4417.87 5955,4492 6264.54,4492 6271.54,4485 ; pad.4@6271.54,4508.23 6271.54,4485 ; v1(6543,3102.34) 6543,4449 6609,4515 ; v1(6625.5,4531.5) 6609,4515 ; 6271.54,4485 6297.54,4459 6333.23,4459 6346.34,4472.11 6346.34,4508.23 6346.34,4515 6609,4515
VCC_1V2: pad.2@3812.87,3516.1 pad.G7 pad.G9 pad.H8 pad.H10 pad.J7 pad.J9 pad.K8 pad.K10 | length 844.8
  Top Layer w6: pad.J7 pad.H8 ; pad.G7 3828.42,3910 3868.19,3910 ; pad.K8 3866.93,3830 3895.94,3830 ; pad.G9 3887.68,3910 ; pad.K10 3914.56,3811.38 3895.94,3830 ; pad.H10 v1(3909.08,3908.08) 3907.16,3910 3887.68,3910 ; pad.H8 pad.J9 3887.68,3838.26 3895.94,3830 ; pad.H8 3868.19,3910 ; 3868.19,3910 3887.68,3910
  Bottom Layer w6: pad.2@3812.87,3516.1 3812,3516.1 3812,3811 v1(3909.08,3908.08)
VCC_3V3: pad.1@3442.79,4268.07 pad.1@3978.23,2848.78 pad.1@4772.87,2846.81 pad.2@3474.29,3480.79 pad.2@3637.68,2886.18 pad.2@3829.25,3338.94 pad.3@4035.31,3895.43 pad.4@3505.79,4268.07 pad.4@4072.72,2923.58 pad.5@5419.17,3004.29 pad.5@6308.94,4508.23 pad.7@4330.59,3845.43 pad.8@4330.59,3795.43 pad.16@5434.92,2846.81 pad.16@6056.97,4167.87 pad.B4 pad.B9 pad.B13 pad.D2 pad.D7 pad.D10 pad.D15 pad.E5 pad.F8 pad.F11 pad.G4 pad.G10 pad.G13 pad.H6 pad.J2 pad.J10 pad.J15 pad.K4 pad.K13 pad.L6 pad.L9 pad.N2 pad.N7 pad.N10 pad.N15 pad.R4 pad.R8 | length 11012.6
  Top Layer w6: pad.1@3442.79,4268.07 3505.79,4268.07 3628.18,4268.07 3671.16,4225.08 3671.16,4146 pad.B4 ; pad.2@3474.29,3480.79 3743.47,3480.79 3820,3557.31 ; pad.N2 3631,3712.18 3631,3780 3642.55,3791.55 3671,3791.55 pad.K4 ; pad.J2 3631.83,3831 ; pad.D2 3622.61,4058.12 3625.82,4058.12 3636.82,4069.12 3663.42,4069.12 3669.3,4075 3669.3,4104.81 pad.B4 ; pad.R4 3712.35,3593 3712.35,3564.96 3720,3557.31 3820,3557.31 ; pad.H6 3751,3871.55 3751,3803 ; pad.N7 3826.78,3675.42 3880,3675.42 ; pad.R8 3826.78,3593 3826.78,3564.09 3820,3557.31 ; pad.F8 3829,3988.16 ; pad.L9 3869.83,3754.16 3869.83,3740 ; pad.B9 3906,4108.01 3906,4068.64 pad.D10 ; pad.N10 3909.2,3675.42 3880,3675.42 ; pad.J10 3945,3868.7 3945,3911.53 pad.G10 pad.F11 ; pad.G13 4063,3911.64 ; pad.B13 4063,4108.49 4063,4080 4077,4066 4105.5,4066 pad.D15 4106,4029.7 4106,3900 ; pad.N15 4106,3711.17 v1(4106,3795.43) 4106,3832.85 ; v1(6258,4167.87) 6323,4232.87 v1(6323,4475) ; 3631.83,3831 3660,3831 3672,3843 3672,3910.66 pad.G4 3711,3949.66 3711,3989.03 pad.E5 ; 3631.83,3831 3672,3830.2 pad.K4 ; pad.K4 3710.2,3792 3740,3792 3751,3803 ; pad.B4 3710,4107.16 3710,4028.42 pad.E5 ; pad.E5 3749.97,4028 3789.34,4028 pad.D7 3826.78,4029.75 3829,3988.16 ; 3751,3803 3751,3790.57 pad.L6 3787.57,3754 3855.83,3754 3869.83,3740 ; 3829,3988.16 3829,4018.75 3840,4029.75 3909.2,4029.75 pad.D10 ; 3869.83,3740 3869.83,3685.59 3880,3675.42 ; pad.D10 3947,4027.64 3947,3988.27 pad.F11 ; pad.F11 3985,3950.27 3985,3885.67 3998.39,3872.27 4011.73,3872.27 4024,3860 4024,3832.53 pad.K13 ; pad.K13 4063,3829.22 4063,3832.85 ; pad.K13 4063,3832.85 ; 4063,3832.85 4063,3839.85 ; 4063,3839.85 4063,3911.64 ; 4063,3839.85 4070,3832.85 4106,3832.85 ; 4063,3911.64 4094.36,3911.64 4106,3900 ; 4106,3832.85 4106,3868.65 ; 4106,3832.85 pad.J15 4106,3868.65 ; 4106,3868.65 4106,3900
  Bottom Layer w6: pad.2@3474.29,3480.79 3503.08,3452 3875.25,3452 ; pad.2@3637.68,2886.18 3637,2886.18 3637,2857 3645.22,2848.78 3978.23,2848.78 4001.78,2848.78 4013,2860 4013,2900 ; pad.3@4035.31,3895.43 4176,3895.43 4226,3845.43 pad.7@4330,3845.43 ; pad.8@4330.59,3795.43 pad.8@4330,3795.43 ; pad.5@5419.17,3004.29 5419.17,3023.17 5425,3029 5480,3029 5506,3003 5506,2840 5482,2816 ; pad.16@5434.92,2846.81 5434.92,2830 5448.92,2816 5482,2816 ; v1(6258,4167.87) 6056.97,4167.87 5940,4167.87 5915,4142.87 5915,3970 5790.43,3845.43 4330.59,3845.43 pad.7@4330,3845.43 ; pad.5@6308.94,4508.23 6308.94,4489.06 v1(6323,4475) ; 3875.25,3452 3829.25,3406 3829.25,3338.94 3829.25,3134.33 4013,2950.58 4013,2900 ; 3875.25,3452 4106,3682.75 v1(4106,3795.43) pad.8@4330,3795.43 ; 4013,2900 4036.58,2923.58 4072.72,2923.58 4749.29,2923.58 4772.87,2900 4772.87,2846.81 4772.87,2810 4782.87,2800 5466,2800 5482,2816 ; pad.8@4330,3795.43 pad.7@4330,3845.43
VCC_VDDA: pad.2@4852.87,2846.81 pad.R13 | length 1470.7
  Top Layer w6: pad.R13 4063,3596.68 4063,3560 4073,3550 v1(4116,3550)
  Bottom Layer w6: v1(4116,3550) 4116,3091 4240,2967 4825.87,2967 4852.87,2940 pad.2@4852.87,2846.81
VIN_5V: pad.1@6594.75,2965.53 pad.1@6594.75,4579.7 pad.3@3637.68,2795.63 | length 5041.7
  Top Layer w6: v1(6562,2907) 6581.75,2907 6594.75,2920 6594.75,2965.53 6594.75,3025 6455,3164.75 6455,4646 6470.79,4661.79 6572.95,4661.79 6594.75,4640 pad.1@6594.75,4579.7
  Bottom Layer w6: pad.3@3637.68,2795.63 4167.37,2795.63 4208,2755 6105,2755 6180,2830 6340,2830 6417,2907 v1(6562,2907)

## Silkscreen, mask and mechanical layers (free items; w line width, h text height)
Top Overlay:
  circle w7: c4861.69,4141.3 r10
  circle w5.91: c3387.95,3476.73 r177.17
  circle w12: c4446.65,3657.32 r6
  lines w7.87: 3533.35,4139.96 3533.35,3535.79 3864.2,3535.79 ; 3543.34,4175.71 3572.72,4205.08 ; 3543.34,4205.08 3700.47,4205.08 ; 3723.53,4205.08 3797.27,4205.08 ; 3820.6,4205.08 4202.64,4205.08 4202.64,3535.79 3887.8,3535.79 ; 4451.65,3691.14 4451.65,3677.32 4701.65,3677.32 4701.65,3691.14 ; 4451.65,3813.5 4451.65,3827.32 4701.65,3827.32 4701.65,3813.5
  lines w10: 3255.55,3571.73 3295.55,3571.73 ; 3275.55,3546.73 3275.55,3591.73 ; 5244.05,3002.4 5484.05,3002.4 ; 5244.05,3081.02 5244.05,3132.4 5244.05,3163.78 ; 5244.05,3242.4 5484.05,3242.4 ; 5244.05,3435.47 5484.05,3435.47 ; 5244.05,3514.09 5244.05,3565.47 5244.05,3596.85 ; 5244.05,3675.47 5484.05,3675.47 ; 5343.83,4113.82 4831.77,4113.82 4831.77,4518.82 6102.64,4518.82 6102.64,4113.82 5348.17,4113.82 ; 5484.05,3081.02 5484.05,3163.78 ; 5484.05,3514.09 5484.05,3596.85 ; 5755.87,3002.4 5995.87,3002.4 ; 5755.87,3081.02 5755.87,3132.4 5755.87,3163.78 ; 5755.87,3242.4 5995.87,3242.4 ; 5755.87,3435.47 5995.87,3435.47 ; 5755.87,3514.09 5755.87,3565.47 5755.87,3596.85 ; 5755.87,3675.47 5995.87,3675.47 ; 5995.87,3081.02 5995.87,3163.78 ; 5995.87,3514.09 5995.87,3596.85 ; 6506.28,2787.83 6506.28,2758.44 6737.01,2758.44 ; 6506.28,2907.79 6506.28,2923.65 ; 6506.28,4402.01 6506.28,4372.61 6737.01,4372.61 ; 6506.28,4521.96 6506.28,4537.82 ; 6697.97,2758.44 6736.61,2758.44 ; 6697.97,4372.61 6736.61,4372.61
Bottom Overlay:
  circle w9.84: c5852.24,4134.41 r4.92
  circle w9.84: c6380.79,4413.74 r4.92
  circle w9.84: c6380.79,2799.57 r4.92
  circle w9.84: c5852.24,2756.46 r4.92
  lines w7: 4355.91,2768.31 4622.91,2768.31 4622.91,2777.31 ; 4355.91,2925.31 4622.91,2925.31 4622.91,2916.31
  lines w7.87: 3521.54,3279.88 3541.22,3279.88 3541.22,3311.38 ; 3521.54,3397.99 3541.22,3397.99 3541.22,3366.5 ; 6311.82,4470.83 6247.91,4470.83 6247.91,4451.14 6369.96,4451.14 6369.96,4470.83 6334.18,4470.83 ; 4015.63,2825.16 4015.63,2947.2 4035.31,2947.2 4035.31,2825.16 4015.63,2825.16 ; 4092.4,3750.35 4092.4,3990.51 4273.5,3990.51 4273.5,3750.35 4092.4,3750.35 ; 5911.3,2768.07 5911.3,3161.77 5997.91,3161.77 5997.91,2768.07 5969.04,2768.07 ccw(c5954.61,2768.07) 5940.17,2768.07 5911.3,2768.07 ; 5911.3,4146.02 5940.17,4146.02 cw(c5954.61,4146.02) 5969.04,4146.02 5997.91,4146.02 5997.91,4539.72 5911.3,4539.72 5911.3,4146.02 ; 6247.91,2836.97 6247.91,2856.65 6369.96,2856.65 6369.96,2836.97 6247.91,2836.97
  lines w9.84: 4033.17,3766.4 cw(c4035.31,3761.97) 4040.24,3761.97
  lines w10: 5323.42,2859.37 5323.42,2845.55 5337.25,2845.55 ; 5323.42,2995.55 5333.42,3005.55 ; 5469.61,2845.55 5483.42,2845.55 5483.42,2859.37 ; 5469.61,3005.55 5483.42,3005.55 5483.42,2991.73 ; 3448.66,2761.18 3448.66,3011.18 3578.66,3011.18 3578.66,2761.18 3448.66,2761.18
  lines w23.62: 4121.77,3783.44 ccw(c4131.77,3789.72) 4143.58,3789.72 ccw(c4131.77,3789.72) 4125.36,3799.64
Mechanical 4:
  region: 5324.68,2846.81 5482.16,2846.81 5482.16,3004.29 5324.68,3004.29
Mechanical 5:
  drawing of 172 lines, arcs and shapes, not listed
  text ".Designator" at 6358.94,4450.98 h20
  text ".Designator" at 3469.29,4294.76 h40 r270
  text ".Designator" at 3745.27,3528.1 h24 r180
  text ".Designator" at 3725.25,3355.94 h35 r180
  text ".Designator" at 3503.66,3303.94 h20 r270
  text ".Designator" at 4406.91,2866.81 h40 r180
  text ".Designator" at 4748.87,2863.81 h35 r180
  text ".Designator" at 4015.63,2848.78 h20 r270
  text ".Designator" at 6358.94,2836.81 h20
Mechanical 6:
  circle w3.94: c5324.68,3004.29 r1.97
  lines w0.79: 2805,2335 2805,5012.16 ; 2805,2335 6742.01,2335 ; 2805,2335 2805,5012.16 ; 2805,2335 6742.01,2335 ; 2805,2335 2805,5012.16 ; 2805,2335 6742.01,2335 ; 2805,2335 2805,5012.16 ; 2805,2335 6742.01,2335 ; 2805,2335 2805,5161.77 6828.62,5161.77 6828.62,2335 2805,2335 ; 2805,5012.16 6742.01,5012.16 ; 2805,5012.16 6742.01,5012.16 ; 2805,5012.16 6742.01,5012.16 ; 2805,5012.16 6742.01,5012.16 ; 6742.01,2335 6742.01,5012.16 ; 6742.01,2335 6742.01,5012.16 ; 6742.01,2335 6742.01,5012.16 ; 6742.01,2335 6742.01,5012.16
Mechanical 13:
  circle w3.94: c4096.34,3785.79 r19.68
  lines w3.94: 3763.66,3310.39 3763.66,3367.48 ; 3775.47,3504.29 3775.47,3527.91 ; 3803.03,3504.29 3803.03,3527.91 ; 3814.84,3310.39 3814.84,3367.48 ; 4787.28,2818.27 4787.28,2875.35 ; 4838.46,2818.27 4838.46,2875.35 ; 3533.35,3535.79 3533.35,4205.08 4202.64,4205.08 4202.64,3535.79 3533.35,3535.79 ; 3745.94,3310.39 3832.56,3310.39 3832.56,3367.48 3745.94,3367.48 3745.94,3310.39 ; 3767.6,3504.29 3810.91,3504.29 3810.91,3527.91 3767.6,3527.91 3767.6,3504.29 ; 4060.91,3750.35 4060.91,3990.51 4305,3990.51 4305,3750.35 4060.91,3750.35 ; 4769.57,2818.27 4856.18,2818.27 4856.18,2875.35 4769.57,2875.35 4769.57,2818.27
Mechanical 15:
  circle w7.87: c5348.42,3005.55 r3.94
  lines w1.97: 3436.89,3270.04 3590.43,3270.04 3590.43,3407.83 3436.89,3407.83 3436.89,3270.04 ; 3946.73,2815.31 3946.73,2957.05 4104.21,2957.05 4104.21,2815.31 3946.73,2815.31 ; 3984.13,3740.51 3984.13,4000.35 4381.77,4000.35 4381.77,3740.51 3984.13,3740.51 ; 6238.07,2768.07 6238.07,2925.55 6379.8,2925.55 6379.8,2768.07 6238.07,2768.07 ; 6238.07,4382.24 6238.07,4539.72 6379.8,4539.72 6379.8,4382.24 6238.07,4382.24
  lines w3.94: 3493.98,3338.94 3533.35,3338.94 ; 3513.66,3319.25 3513.66,3358.62 ; 3777.44,3516.1 3801.06,3516.1 ; 3789.25,3504.29 3789.25,3527.91 ; 3848.31,3870.43 3887.68,3870.43 ; 3867.99,3850.75 3867.99,3890.12 ; 4005.79,2886.18 4045.16,2886.18 ; 4025.47,2866.5 4025.47,2905.87 ; 4163.27,3870.43 4202.64,3870.43 ; 4182.95,3850.75 4182.95,3890.12 ; 4478.23,2846.81 4517.6,2846.81 ; 4497.91,2827.13 4497.91,2866.5 ; 6289.25,2846.81 6328.62,2846.81 ; 6289.25,4460.98 6328.62,4460.98 ; 6308.94,2827.13 6308.94,2866.5 ; 6308.94,4441.3 6308.94,4480.67 ; 3493.98,3496.42 3493.98,4244.45 4242.01,4244.45 4242.01,3496.42 3493.98,3496.42 ; 3740.04,3494.45 3838.46,3494.45 3838.46,3537.76 3740.04,3537.76 3740.04,3494.45 ; 4358.15,2758.23 4358.15,2935.39 4637.68,2935.39 4637.68,2758.23 4358.15,2758.23